# Altium PCB 2020年电赛校赛.PcbDoc (part 1 of 2)
Units mil, origin at the board's own origin, x right, y up, seen from the top; angles counter-clockwise.
Board outline 6325.03 x 2765.03 mil, 2 copper layers (Top Layer, Bottom Layer); 190 components, 62 nets, 601 pads, 1 vias.
Unrouted connection lines stored in the file: 82.
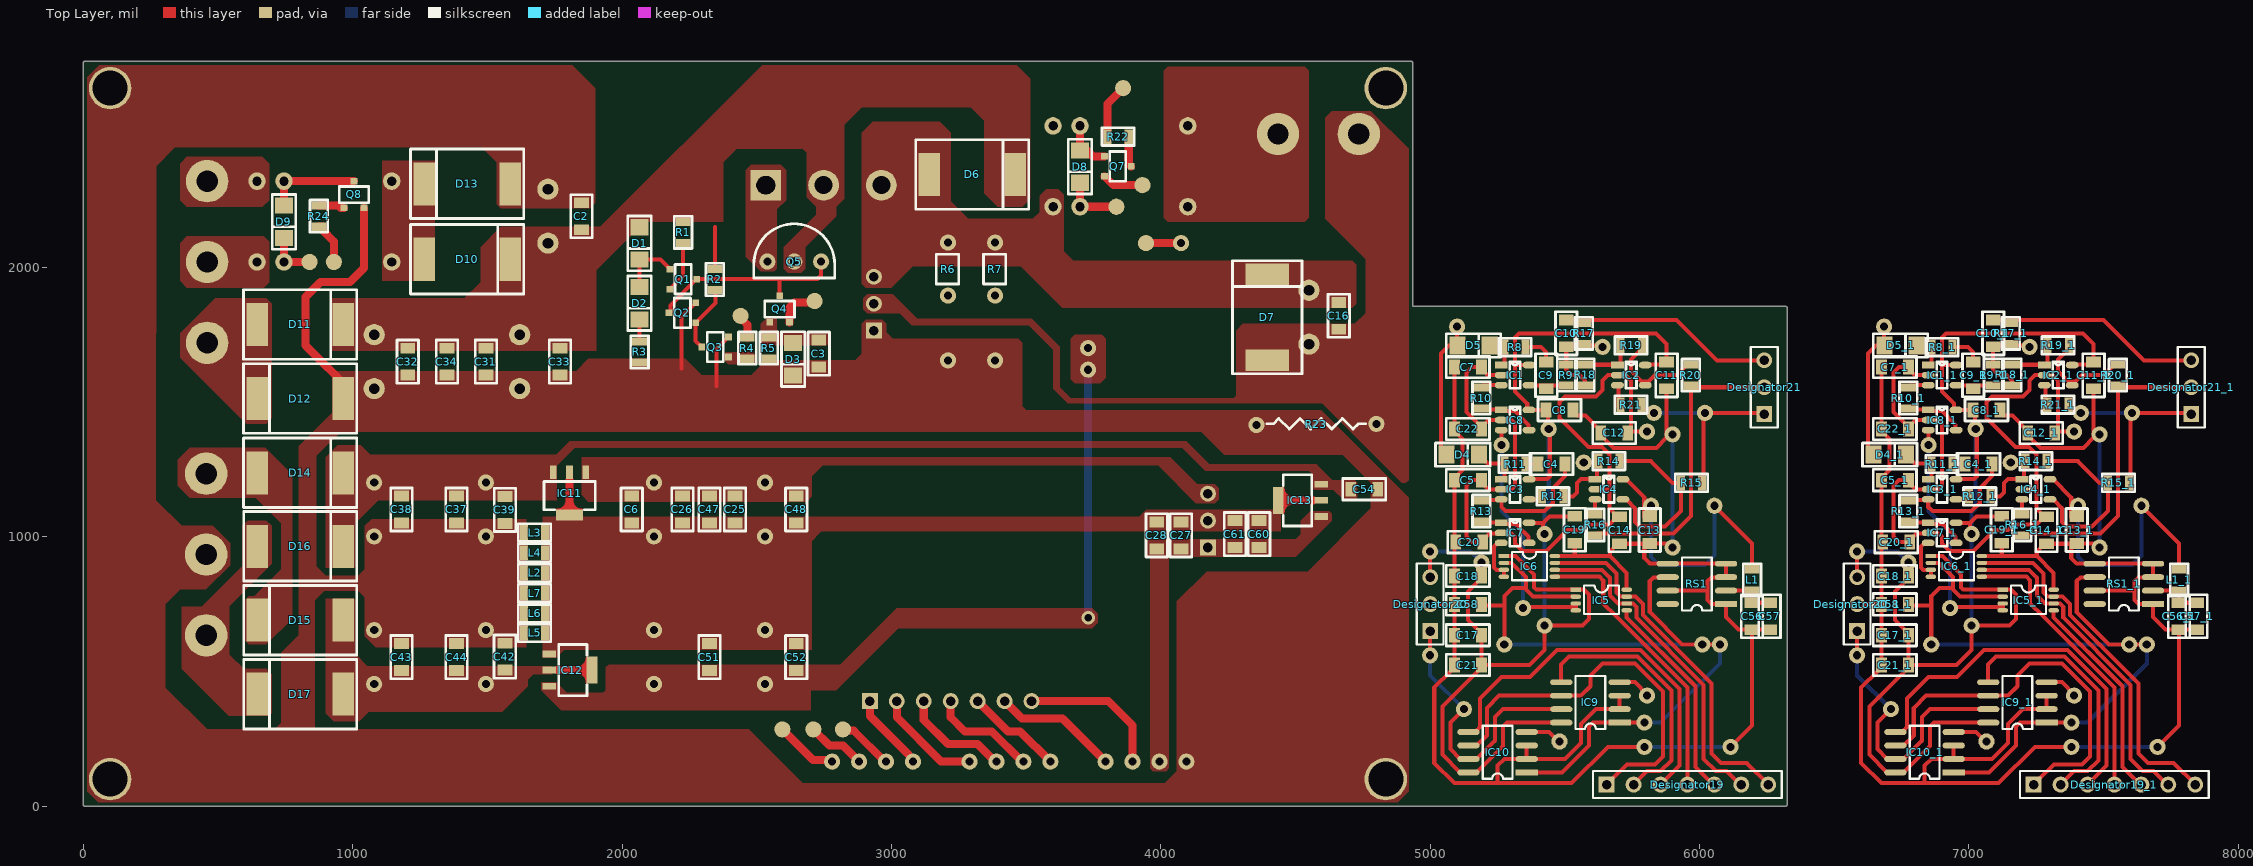
[diagram p0: Top Layer view]
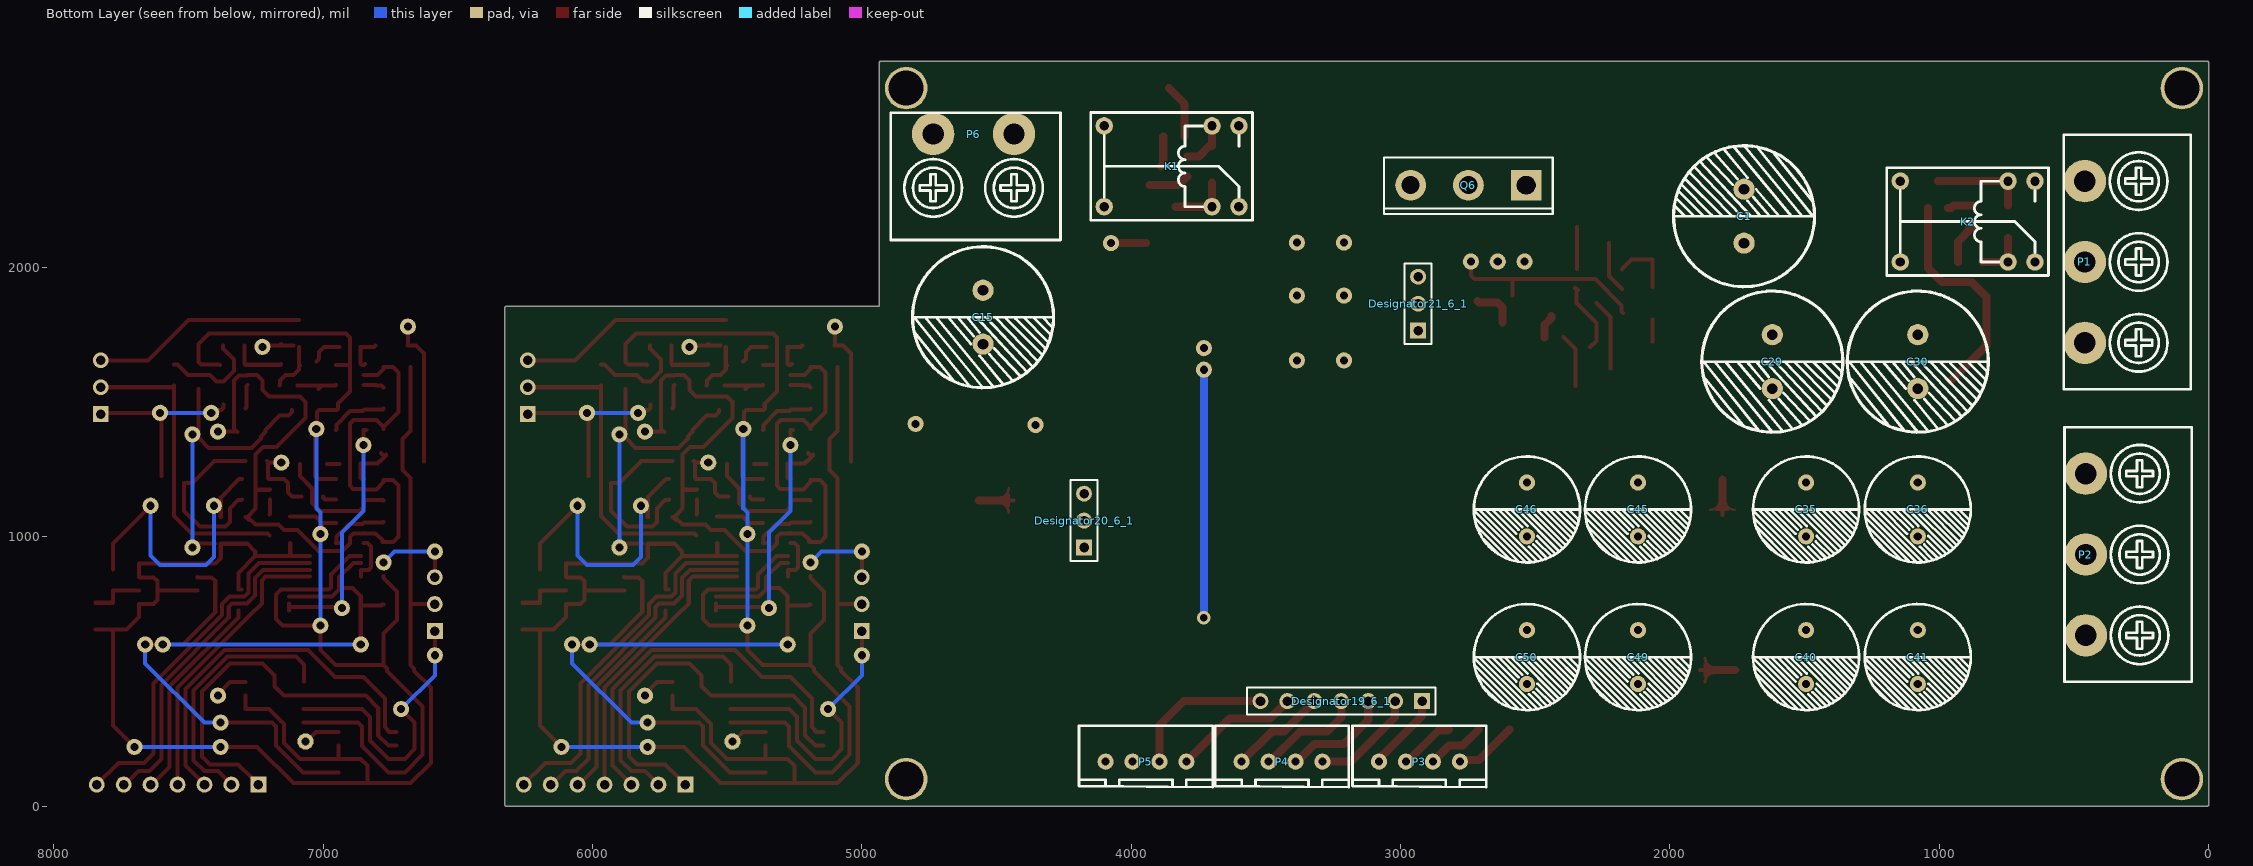
[diagram p1: Bottom Layer view, seen from below]

## Layer stack, top to bottom
Top Solder: solder mask 0.4, Solder Resist, Dk 3.5
Top Layer: signal copper 1.4
Dielectric 1: dielectric 12.6, FR-4, Dk 4.8
Bottom Layer: signal copper 1.4
Bottom Solder: solder mask 0.4, Solder Resist, Dk 3.5

## Board outline
5,-0.02 cw(c5,5) -0.01,5 -0.01,2760 cw(c5,2760) 5,2765.02 4930,2765.02 cw(c4930,2760) 4935.02,2760 4935.02,1855.01 6320,1855.01 cw(c6320,1850) 6325.02,1850 6325.02,5 cw(c6320,5) 6320,-0.02

## Design rules (kind name [scope] priority, off if disabled: settings)
Clearance [All] p1: gap=5 ignorepadtopadclearanceinfootprint=TRUE
ComponentClearance [All] p1: gap=5 collisioncheckmode=3 verticalgap=10 showdistances=FALSE
PolygonConnect [All] p1: connectstyle=Direct reliefconductorwidth=10 reliefentries=4 polygonreliefangle="90 Angle" airgapwidth=10
RoutingVias [All] p1: holewidth=28 width=50 viastyle="Through Hole" minholewidth=28 minwidth=50 maxholewidth=28 maxwidth=50
SolderMaskExpansion [All] p1: expansion=4 istentingtop=FALSE
Width [All] p1: maxlimit=100 minlimit=10 preferedwidth=30 minimp=50.000000 maximp=50.000000 favimp=50.000000
29 further rules are at their usual default settings.

## Classes and differential pairs
component class 2020年电赛校赛电源板: C29 C30 C31 C32 C33 C34 C35 C36 C37 C38 C39 C40 C41 C42 C43 C44 C45 C46 C47 C48 C49 C50 C51 C52 C54 C56 C57 C58 C60 C61 D9 D10 D11 D12 D13 D14 D15 D16 D17 IC11 IC12 IC13 K2 L1 L2 L3 L4 L5 L6 L7 P1 P2 P3 P4 P5 Q8 R24 RS1
component class 2020年电赛校赛测量、基准板: C17 C18 C19 C20 C21 C22 C25 C26 C27 C28 IC5 IC6 IC7 IC8 IC9 IC10
component class 2020年电赛校赛功率板: C1 C2 C3 C4 C5 C6 C7 C8 C9 C10 C11 C12 C13 C14 C15 C16 D1 D2 D3 D4 D5 D6 D7 D8 IC1 IC2 IC3 IC4 K1 P6 Q1 Q2 Q3 Q4 Q5 Q6 Q7 R1 R2 R3 R4 R5 R6 R7 R8 R9 R10 R11 R12 R13 R14 R15 R16 R17 R18 R19 R20 R21 R22 R23

## Components (designator, comment, footprint, x,y, rotation, side; value= is the part's Value field where it differs from the comment)
C1 "1000uF" CR132(Φ13.2,间距5.1) 1725,2190 r90 bottom value=50V
C2 "104" C0805 1849.4,2190 r180 top value=100V
C3 "222" C0805 2730,1680 r0 top value=35V
C4 "104" C0805 5450,1270 r270 top value=35V
C4_1 "104" C0805 7035,1270 r270 top value=35V (schematic designator C4)
C5 "104" C0805 5140,1210 r270 top value=35V
C5_1 "104" C0805 6725,1210 r270 top value=35V (schematic designator C5)
C6 "104" C0805 2035.9,1101.2 r0 top value=35V
C7 "104" C0805 5140,1630 r270 top value=35V
C7_1 "104" C0805 6725,1630 r270 top value=35V (schematic designator C7)
C8 "104" C0805 5480,1470 r90 top value=35V
C8_1 "104" C0805 7065,1470 r90 top value=35V (schematic designator C8)
C9 "472" C0805 5431.05,1599.1 r180 top value=35V
C9_1 "472" C0805 7016.05,1599.1 r180 top value=35V (schematic designator C9)
C10 "104" C0805 5505,1755 r0 top value=35V
C10_1 "104" C0805 7090,1755 r0 top value=35V (schematic designator C10)
C11 "104" C0805 5877.73,1598.98 r0 top value=35V
C11_1 "104" C0805 7462.73,1598.98 r0 top value=35V (schematic designator C11)
C12 "104" C0805 5683.14,1385.29 r270 top value=35V
C12_1 "104" C0805 7268.14,1385.29 r270 top value=35V (schematic designator C12)
C13 "104" C0805 5815,1025 r0 top value=35V
C13_1 "104" C0805 7400,1025 r0 top value=35V (schematic designator C13)
C14 "104" C0805 5703.01,1024.07 r0 top value=35V
C14_1 "104" C0805 7288.01,1024.07 r0 top value=35V (schematic designator C14)
C15 "1000uF" CR132(Φ13.2,间距5.1) 4550,1815 r270 bottom value=50V
C16 "104" C0805 4660.4,1820 r0 top value=100V
C17 "104" C0805 5140,634.13 r90 top value=35V
C17_1 "104" C0805 6725,634.13 r90 top value=35V (schematic designator C17)
C18 "104" C0805 5140,854.08 r90 top value=35V
C18_1 "104" C0805 6725,854.08 r90 top value=35V (schematic designator C18)
C19 "104" C0805 5536.61,1025.87 r0 top value=35V
C19_1 "104" C0805 7121.61,1025.87 r0 top value=35V (schematic designator C19)
C20 "104" C0805 5145,980 r270 top value=35V
C20_1 "104" C0805 6730,980 r270 top value=35V (schematic designator C20)
C21 "104" C0805 5140,523.43 r270 top value=35V
C21_1 "104" C0805 6725,523.43 r270 top value=35V (schematic designator C21)
C22 "104" C0805 5140,1400 r270 top value=35V
C22_1 "104" C0805 6725,1400 r270 top value=35V (schematic designator C22)
C25 "104" C0805 2419.71,1101.2 r0 top value=35V
C26 "104" C0805 2224.15,1101.2 r0 top value=35V
C27 "104" C0805 4075,1005 r0 top value=35V
C28 "104" C0805 3985,1005 r0 top value=35V
C29 "1000uF" CR132(Φ13.2,间距5.1) 1620,1650 r270 bottom value=50V
C30 "1000uF" CR132(Φ13.2,间距5.1) 1080,1650 r270 bottom value=50V
C31 "104" C0805 1494.63,1650 r0 top value=100V
C32 "104" C0805 1204.34,1650 r0 top value=100V
C33 "104" C0805 1769.31,1650 r0 top value=100V
C34 "104" C0805 1350,1650 r0 top value=100V
C35 "100uF" CR100(Φ10.0,间距4.9） 1494.63,1101.2 r270 bottom value=50V
C36 "100uF" CR100(Φ10.0,间距4.9） 1080,1101.2 r270 bottom value=50V
C37 "104" C0805 1385.64,1101.2 r0 top value=35V
C38 "104" C0805 1181.45,1101.2 r0 top value=35V
C39 "104" C0805 1565.05,1099.61 r0 top value=35V
C40 "100uF" CR100(Φ10.0,间距4.9） 1494.63,553.21 r270 bottom value=50V
C41 "100uF" CR100(Φ10.0,间距4.9） 1080,553.21 r270 bottom value=50V
C42 "104" C0805 1565,555 r0 top value=100V
C43 "104" C0805 1181.45,553.21 r0 top value=100V
C44 "104" C0805 1385.64,553.21 r0 top value=100V
C45 "100uF" CR100(Φ10.0,间距4.9） 2118.52,1101.2 r270 bottom value=50V
C46 "100uF" CR100(Φ10.0,间距4.9） 2530.85,1101.2 r270 bottom value=50V
C47 "104" C0805 2324.61,1101.2 r0 top value=100V
C48 "104" C0805 2646.85,1101.2 r0 top value=100V
C49 "100uF" CR100(Φ10.0,间距4.9） 2118.52,553.21 r270 bottom value=50V
C50 "100uF" CR100(Φ10.0,间距4.9） 2530.85,553.21 r270 bottom value=50V
C51 "104" C0805 2324.61,553.21 r0 top value=100V
C52 "104" C0805 2646.85,553.21 r0 top value=100V
C54 "104" C0805 4755,1176.21 r90 top value=35V
C56 "104" C0805 6195,705 r0 top value=35V
C56_1 "104" C0805 7780,705 r0 top value=35V (schematic designator C56)
C57 "104" C0805 6260,705 r0 top value=35V
C57_1 "104" C0805 7845,705 r0 top value=35V (schematic designator C57)
C58 "104" C0805 5140,748.98 r270 top value=35V
C58_1 "104" C0805 6725,748.98 r270 top value=35V (schematic designator C58)
C60 "104" C0805 4365,1010 r180 top value=35V
C61 "104" C0805 4275,1010 r180 top value=35V
D1 "1N4148" LL34 2065,2090 r270 top
D2 "1N4148" LL34 2065,1867.61 r270 top
D3 "1N4148" LL34 2635,1660 r270 top
D4 "1N4148" LL34 5120,1305 r0 top
D4_1 "1N4148" LL34 6705,1305 r0 top (schematic designator D4)
D5 "1N4148" LL34 5160,1710 r0 top
D5_1 "1N4148" LL34 6745,1710 r0 top (schematic designator D5)
D6 "SK1010" SMC(DO-214AB) 3300,2345 r270 top
D7 "SK1010" SMC(DO-214AB) 4395,1815 r0 top
D8 "1N4148" LL34 3700,2375 r270 top
D9 "1N4148" LL34 745,2170 r270 top
D10 "SK1010" SMC(DO-214AB) 1425,2030 r270 top
D11 "SK1010" SMC(DO-214AB) 805.02,1787.98 r270 top
D12 "SK1010" SMC(DO-214AB) 805,1512.9 r90 top
D13 "SK1010" SMC(DO-214AB) 1425,2310 r90 top
D14 "SK1010" SMC(DO-214AB) 805.02,1237.21 r270 top
D15 "SK1010" SMC(DO-214AB) 805.21,690.21 r90 top
D16 "SK1010" SMC(DO-214AB) 805.21,964.46 r270 top
D17 "SK1010" SMC(DO-214AB) 805.21,415.54 r90 top
Designator19 "Comment" HDR1X7 5655,80 r0 top
Designator19_1 "Comment" HDR1X7 7240,80 r0 top
Designator19_6_1 "Comment" HDR1X7 2920,390 r0 bottom
Designator20 "Comment" HDR1X3#1 5000,650 r90 top
Designator20_1 "Comment" HDR1X3#1 6585,650 r90 top
Designator20_6_1 "Comment" HDR1X3#1 4175,960 r90 bottom
Designator21 "Comment" HDR1X3#1 6240,1455 r90 top
Designator21_1 "Comment" HDR1X3#1 7825,1455 r90 top
Designator21_6_1 "Comment" HDR1X3#2 2935,1765 r90 bottom
IC1 "LTC2054HV" TSOT-32-5 5315,1600 r0 top
IC1_1 "LTC2054HV" TSOT-32-5 6900,1600 r0 top (schematic designator IC1)
IC2 "LTC2054HV" TSOT-32-5 5746.19,1600 r0 top
IC2_1 "LTC2054HV" TSOT-32-5 7331.19,1600 r0 top (schematic designator IC2)
IC3 "LTC2054HV" TSOT-32-5 5315,1176.2 r0 top
IC3_1 "LTC2054HV" TSOT-32-5 6900,1176.2 r0 top (schematic designator IC3)
IC4 "LTC2054HV" TSOT-32-5 5663.14,1176.21 r0 top
IC4_1 "LTC2054HV" TSOT-32-5 7248.14,1176.21 r0 top (schematic designator IC4)
IC5 "DAC8551" MSOP-8 5635,765 r0 top
IC5_1 "DAC8551" MSOP-8 7220,765 r0 top (schematic designator IC5)
IC6 "DAC8551" MSOP-8 5368.17,890 r0 top
IC6_1 "DAC8551" MSOP-8 6953.17,890 r0 top (schematic designator IC6)
IC7 "LTC2054HV" TSOT-32-5 5315,1014.43 r0 top
IC7_1 "LTC2054HV" TSOT-32-5 6900,1014.43 r0 top (schematic designator IC7)
IC8 "LTC2054HV" TSOT-32-5 5315,1433.31 r0 top
IC8_1 "LTC2054HV" TSOT-32-5 6900,1433.31 r0 top (schematic designator IC8)
IC9 "TM7711" SOP-8(体宽3.8mm) 5595,385 r180 top
IC9_1 "TM7711" SOP-8(体宽3.8mm) 7180,385 r180 top (schematic designator IC9)
IC10 "TM7711" SOP-8(体宽3.8mm) 5250,200 r180 top
IC10_1 "TM7711" SOP-8(体宽3.8mm) 6835,200 r180 top (schematic designator IC10)
IC11 "78L05" SOT-89#1 1805,1150 r180 top
IC12 "79L05" SOT-89#2 1820,505 r270 top
IC13 "78L05" SOT-89#1 4505,1135 r90 top
K1 "HRS1H-S-DC 6V" 继电器 3600,2225 r90 bottom
K2 "HRS1H-S-DC 6V" 继电器 645,2020 r90 bottom
L1 "100μH" R0805 6195,840 r180 top
L1_1 "100μH" R0805 7780,840 r180 top (schematic designator L1)
L2 "100μH" R0805 1675.1,865.58 r90 top
L3 "100μH" R0805 1675.1,1015.58 r90 top
L4 "100μH" R0805 1675.1,940.58 r90 top
L5 "100μH" R0805 1675.03,643.03 r90 top
L6 "100μH" R0805 1675.1,715.58 r90 top
L7 "100μH" R0805 1675.1,790.58 r90 top
P1 "主绕组 KF DG1000-3P" KF7.62-3P 460,2020 r90 bottom
P2 "辅助供电绕组 KF DG1000-3P" KF7.62-3P 456.46,934 r90 bottom
P3 "逻辑接口" XH2.54-4P 3080,165 r180 bottom
P4 "逻辑接口" XH2.54-4P 3590,165 r180 bottom
P5 "逻辑接口" XH2.54-4P 4095,165 r180 bottom
P6 "输出" KF7.62-2P 4735,2495 r180 bottom
Q1 "2N5401" SOT-23 2226.92,1956 r90 top
Q2 "2N5551" SOT-23 2224.15,1831.12 r270 top
Q3 "8050" SOT-23 2346.11,1704.16 r270 top
Q4 "2N5551" SOT-23 2585,1845 r180 top
Q5 "2SC2383" TO-92 2639.26,2021.51 r0 top
Q6 "TIP35" TO-247 2748.14,2305 r0 bottom
Q7 "8050" SOT-23 3840,2375 r90 top
Q8 "8050" SOT-23 1005,2270 r180 top
R1 "820" R0805 2226.92,2130 r180 top value=0805
R2 "10kΩ" R0805 2345,1955 r180 top value=0805
R3 "10kΩ" R0805 2065,1685.92 r180 top value=0805
R4 "1kΩ" R0805 2465,1700 r0 top value=0805
R5 "3kΩ" R0805 2545,1700 r180 top value=0805
R6 "1kΩ" RES-1W(立式) 3210,1895 r270 top value=1W
R7 "1kΩ" RES-1W(立式) 3385,1895 r270 top value=1W
R8 "10kΩ" R0805 5315,1704.19 r90 top value=0805
R8_1 "10kΩ" R0805 6900,1704.19 r90 top value=0805 (schematic designator R8)
R9 "10kΩ" R0805 5505,1600.33 r180 top value=0805
R9_1 "10kΩ" R0805 7090,1600.33 r180 top value=0805 (schematic designator R9)
R10 "10kΩ" R0805 5190,1515 r0 top value=0805
R10_1 "10kΩ" R0805 6775,1515 r0 top value=0805 (schematic designator R10)
R11 "10kΩ" R0805 5315,1270 r90 top value=0805
R11_1 "10kΩ" R0805 6900,1270 r90 top value=0805 (schematic designator R11)
R12 "10kΩ" R0805 5455,1150 r90 top value=0805
R12_1 "10kΩ" R0805 7040,1150 r90 top value=0805 (schematic designator R12)
R13 "10kΩ" R0805 5190,1094.93 r0 top value=0805
R13_1 "10kΩ" R0805 6775,1094.93 r0 top value=0805 (schematic designator R13)
R14 "18kΩ" R0805 5663.14,1280.58 r270 top value=0805
R14_1 "18kΩ" R0805 7248.14,1280.58 r270 top value=0805 (schematic designator R14)
R15 "2kΩ" R0805 5970,1200 r270 top value=0805
R15_1 "2kΩ" R0805 7555,1200 r270 top value=0805 (schematic designator R15)
R16 "2kΩ" R0805 5613.01,1044.07 r180 top value=0805
R16_1 "2kΩ" R0805 7198.01,1044.07 r180 top value=0805 (schematic designator R16)
R17 "180kΩ" R0805 5570,1755 r180 top value=0805
R17_1 "180kΩ" R0805 7155,1755 r180 top value=0805 (schematic designator R17)
R18 "20kΩ" R0805 5576.19,1600.64 r180 top value=0805
R18_1 "20kΩ" R0805 7161.19,1600.64 r180 top value=0805 (schematic designator R18)
R19 "2kΩ" R0805 5746.19,1710.48 r270 top value=0805
R19_1 "2kΩ" R0805 7331.19,1710.48 r270 top value=0805 (schematic designator R19)
R20 "18kΩ" R0805 5967.71,1600 r180 top value=0805
R20_1 "18kΩ" R0805 7552.71,1600 r180 top value=0805 (schematic designator R20)
R21 "2kΩ" R0805 5745,1490.22 r270 top value=0805
R21_1 "2kΩ" R0805 7330,1490.22 r270 top value=0805 (schematic designator R21)
R22 "1kΩ" R0805 3841.5,2485.07 r270 top value=0805
R23 "100mΩ" 100mΩ康铜 4799.88,1418.94 r180 top value=康铜
R24 "1kΩ" R0805 875,2190 r0 top value=0805
RS1 "ADR4533" SOP-8(体宽3.8mm) 5990,825 r180 top
RS1_1 "ADR4533" SOP-8(体宽3.8mm) 7575,825 r180 top (schematic designator RS1)

## Footprints (in the part's own frame and the unit in brackets; to place one, negate y for a bottom-side part, rotate by r counter-clockwise, add the part's x,y. Pads: shape width x height; smd on the part's side, far side on the other; paste and mask are expansions set on the pad)
100mΩ康铜 [mil]
  round 60 hole 30: 1(0,0) 2(444.88,3.94)
  silkscreen extent 39,-20 406,20
C0805 [mil]
  rect 55x40 smd: 1(0,-50) 2(0,50)
  silkscreen extent -40,-80 40,80, body extent -25,-43 25,43, height 50
CR100(Φ10.0,间距4.9） [mil]
  round 60 hole 30: 1(-100,0) 2(100,0)
  silkscreen extent -197,-197 197,197
CR132(Φ13.2,间距5.1) [mm]
  round 2 hole 1: 1(-2.54,0) 2(2.54,0)
  silkscreen extent -6.65,-6.65 6.65,6.65, body extent -6.77,-6.77 6.73,6.73, height 22.1
HDR1X3#1 [mm] "Connector; Header; 3 Position"
  rect 1.5x1.5 hole 0.9: 1(0,0)
  round 1.5 hole 0.9: 2(2.54,0) 3(5.08,0)
  silkscreen extent -1.27,-1.27 6.35,1.27
HDR1X3#2 [mm] "Connector; Header; 3 Position"
  round 1.5 hole 0.9: 2(2.54,0) 3(5.08,0)
  rect 1.5x1.5 hole 0.9: 3(0,0)
  silkscreen extent -1.27,-1.27 6.35,1.27
HDR1X7 [mm] "Connector; Header; 7 Position"
  rect 1.5x1.5 hole 0.9: 1(0,0)
  round 1.5 hole 0.9: 2(2.54,0) 3(5.08,0) 4(7.62,0) 5(10.16,0) 6(12.7,0) 7(15.24,0)
  silkscreen extent -1.27,-1.27 16.51,1.27
KF7.62-2P [mm] "接线器"
  round 4 hole 2: 1(0,0) 2(7.62,0)
  silkscreen extent -4,-10 12,2
KF7.62-3P [mm]
  round 4 hole 2: 1(-7.62,0) 2(0,0) 3(7.62,0)
  silkscreen extent -12,-10 12,2
LL34 [mil] "贴片二极管"
  rect 60x66 smd: 1(-59.06,0) 2(61.02,0)
  silkscreen extent -100,-43 102,43, body extent -69,-30 69,30, height 59
MSOP-8 [mm]
  rect 1x0.41 smd: 1(-2.4,0.975)
  oval 1x0.41 smd: 2(-2.4,0.325) 3(-2.4,-0.325) 4(-2.4,-0.975) 5(2.4,-0.975) 6(2.4,-0.325) 7(2.4,0.325) 8(2.4,0.975)
  silkscreen extent -1.64,-1.31 1.66,1.36, body extent -2.47,-1.55 2.47,1.55, height 1.1
R0805 [mil]
  rect 55x30 smd: 1(0,39.38) 2(0,-39.36)
  silkscreen extent -33,-60 33,60, body extent -25,-39 25,39, height 20
RES-1W(立式) [mil]
  round 60 hole 30: 1(0,0) 2(-196.85,0)
  silkscreen extent -154,-43 -43,39, body extent -213,-83 83,83, height 728
SMC(DO-214AB) [mil]
  rect 160x80 smd: 1(0,-160) 2(0,160)
  silkscreen extent -129,-210 129,210, body extent -124,-160 124,160, height 105
SOP-8(体宽3.8mm) [mm]
  rect 2.1x0.55 smd: 1(-2.75,1.905)
  oval 2.1x0.55 smd: 2(-2.75,0.635) 3(-2.75,-0.635) 4(-2.75,-1.905) 5(2.75,-1.905) 6(2.75,-0.635) 7(2.75,0.635) 8(2.75,1.905)
  silkscreen extent -1.4,-2.5 1.4,2.5, body extent -3.13,-2.53 3.13,2.53, height 1.76
SOT-23 [mil]
  rect 25x25 smd: 1(37,49) 2(0,-50) 3(-37,49)
  silkscreen extent -55,-30 55,30, body extent -59,-49 59,49, height 43
SOT-89#1 [mil]
  rect 25x50 smd: 1(-60,-90) 2(0,-90) 3(60,-90)
  rect 100x40 smd: 2(0.01,68.9)
  Top Layer region: -20,35 20,35 20,50 -20,50
  Top Layer region: -25,45 25,45 25,55 -25,55
  Top Layer region: -15,30 15,30 15,40 -15,40
  Top Layer region: -15,25 15,25 15,35 -15,35
  Top Layer lines w10: 10,15 cw(c45,15) 45,50 ccw(c45,15) 10,15 ; 10,15 10,-60 ; 10,15 10,-60 ; 10,-60 cw(c0,-60) 0,-70 ; 10,-60 cw(c0,-60) 0,-70 ; 0,68.89 ccw(c0,68.9) 0.01,68.9 ; 0,68.89 ccw(c0,68.9) 0.01,68.9 ; 0,-70 cw(c0,-60) -10,-60 ; 0,-70 cw(c0,-60) -10,-60 ; 0,-70 ccw(c0.01,-69.99) 0,-70 ; 0,-70 ccw(c0.01,-69.99) 0,-70 ; 0,-70 ccw(c0.01,-69.99) 0,-70 ; 0,-70 ccw(c0.01,-69.99) 0.01,-70 ; 0,-70 ccw(c0.01,-69.99) 0.01,-70 ; 0,-70 ccw(c0.01,-69.99) 0,-70 ; -10,15 ccw(c-45,15) -45,50 cw(c-45,15) -10,15 ; -10,15 -10,-5 ; -10,15 -10,-5 ; -10,-5 -10,-60 ; -10,-5 -10,-60
  Top Layer lines w15: 0,68.89 0,68.89 ; 0,68.89 0,68.89 ; 0,68.89 0,5 ; 0,68.89 0,68.89 ; 0,68.89 0,68.89 ; 0,68.89 0,5 ; 0,68.89 0,68.89 ; 0,68.89 0,68.89 ; 0,68.89 0,68.89 ; 0,68.89 0,68.89 ; 0,68.89 0,68.89 ; 0,68.89 0,68.89 ; 0,68.89 0,68.89 ; 0,68.89 0,68.89 ; 0,68.89 0,68.89 ; 0,68.89 0,68.89 ; 0,68.89 0,68.89 ; 0,68.89 0,68.89 ; 0,68.89 0,68.89 ; 0,68.89 0,68.89 ; 0,68.89 0,68.89 ; 0,68.89 0,68.89 ; 0,68.89 0,68.89 ; 0,68.89 0,68.89 ; 0,5 0,-70 ; 0,5 0,-70 ; 0,-70 0,-70 ; 0,-70 0,-70 ; 0,-70 0,-70 ; 0,-70 0,-70 ; 0,-70 0,-70 ; 0,-70 0,-70 ; 0,-70 0,-70 ; 0,-70 0,-70 ; 0,-70 0,-70 ; 0,-70 0,-70 ; 0,-70 0,-70 ; 0,-70 0,-70 ; 0,-70 0,-70 ; 0,-70 0,-70 ; 0,-70 0,-70 ; 0,-70 0,-70 ; 0,-70 0,-70 ; 0,-70 0,-70 ; 0,-70 0,-70 ; 0,-70 0,-70 ; 0,-70 0,-70 ; 0,-70 0,-70
  silkscreen extent -95,-55 95,50, body extent -89,-89 89,69, height 61
SOT-89#2 [mil]
  rect 25x50 smd: 1(-60,-90) 2(0,-90) 3(60,-90)
  rect 100x40 smd: 2(0.01,68.9)
  Top Layer region: -20,35 20,35 20,50 -20,50
  Top Layer region: -25,45 25,45 25,55 -25,55
  Top Layer region: -15,30 15,30 15,40 -15,40
  Top Layer region: -15,25 15,25 15,35 -15,35
  Top Layer lines w10: 0,-70 ccw(c0,-60) 10,-60 ; 0,-70 cw(c0,-60) -10,-60 ; 0,-70 ccw(c0.01,-69.99) 0.01,-70 ; 0,-70 ccw(c0,-60) 10,-60 ; 0,-70 ccw(c0.01,-69.99) 0,-70 ; 0,-70 ccw(c0.01,-69.99) 0.01,-70 ; 0,-70 ccw(c0.01,-69.99) 0,-70 ; 0,-70 cw(c0,-60) -10,-60 ; 10,-60 10,15 ; 10,-60 10,15 ; -10,-60 -10,15 ; -10,-60 -10,15 ; 10,15 cw(c45,15) 26.97,45 cw(c45,15) 45,50 ccw(c45,15) 10,15 ; -10,15 ccw(c-45,15) -13.38,30 ; -10,15 ccw(c-45,15) -13.38,30 ; -13.38,30 ccw(c-45,15) -45,50 cw(c-45,15) -13.38,30 ; 0,68.89 ccw(c0,68.9) 0.01,68.9 ; 0,68.89 ccw(c0,68.9) 0.01,68.9
  Top Layer lines w15: 0,-70 0,5 ; 0,-70 0,-70 ; 0,-70 0,5 ; 0,-70 0,-70 ; 0,-70 0,-70 ; 0,5 0,30 ; 0,5 0,30 ; 0,30 0,53 ; 0,30 0,53 ; 0,53 0,68.89 ; 0,53 0,68.89 ; 0,68.89 0,68.89 ; 0,68.89 0,68.89 ; 0,68.89 0,68.89
  silkscreen extent -95,-55 95,50, body extent -89,-89 89,69, height 61
TO-92 [mil]
  round 60 hole 30: 1(-100,0) 2(0,0) 3(100,0)
  silkscreen extent -150,-61 150,140, body extent -109,-61 109,100, height 405
TO-247 [mm]
  rect 2.9x2.9 hole 1.7 slot 1.785 at 0 deg copper offset 0.001,0: 1(-5.45,0)
  round 2.9 hole 1.7: 2(-0.001,0) 3(5.45,0)
  silkscreen extent -7.95,-2.6 7.95,2.7, body extent -7.9,-2.26 7.9,3.05, height 25.24
TSOT-32-5 [mm]
  rect 1.22x0.62 smd: 1(-1.3,0.95)
  oval 1.22x0.62 smd: 2(-1.3,0) 3(-1.3,-0.95) 4(1.32,-0.95) 5(1.32,0.95)
  silkscreen extent -0.5,-1.25 0.5,1.25, body extent -1.4,-1.45 1.4,1.45, height 0.85
XH2.54-4P [mil] "连接器"
  round 60 hole 30: 1(0,0) 2(100,0) 3(200,0) 4(300,0)
  silkscreen extent -98,-94 398,134, body extent -96,-94 396,134, height 276
继电器 [mil]
  round 65 hole 35: 1(0,0) 2(0,100) 3(0,500) 4(300,500) 5(300,100) 6(300,0)
  silkscreen extent -50,-50 350,550

## Part data
C1 C15 C29 C30: library part 100uF, "有极性电容"
C2 C4 C4_1 C5 C5_1 C6 C7 C7_1 C8 C8_1 C10 C10_1 C11 C11_1 C12 C12_1 C13 C13_1 C14 C14_1 C16 C17 C17_1 C18 C18_1 C19 C19_1 C20 C20_1 C21 C21_1 C22 C22_1 C25 C26 C27 C28 C31 C32 C33 C34 C37 C38 C39 C42 C43 C44 C47 C48 C51 C52 C54 C56 C56_1 C57 C57_1 C58 C58_1 C60 C61: "无极性电容"
C3 C9 C9_1: library part 104, "无极性电容"
C35 C36 C40 C41 C45 C46 C49 C50: "有极性电容"
D1 D2 D3 D4 D4_1 D5 D5_1 D6 D7 D8 D9 D10 D11 D12 D13 D14 D15 D16 D17: library part Diode, "二极管"
IC1 IC1_1 IC2 IC2_1 IC3 IC3_1 IC4 IC4_1 IC7 IC7_1 IC8 IC8_1: library part OPA350UA, "运放"
IC11 IC13: library part AMS1117-3.3, "LDO"
IC12: library part 790?, "LDO"
K1 K2: "继电器"
L1 L1_1 L2 L3 L4 L5 L6 L7: library part 470mH, "电感"
P1 P2: library part "Header 3", "Header, 3-Pin", LatestRevisionDate=17-Jul-2002, LatestRevisionNote="Re-released for DXP Platform.", Publisher="Altium Limited"
P3 P4 P5: library part "Header 4", "Header, 4-Pin", LatestRevisionDate=17-Jul-2002, LatestRevisionNote="Re-released for DXP Platform.", Publisher="Altium Limited"
P6: library part "Header 2", "Header, 2-Pin", LatestRevisionDate=17-Jul-2002, LatestRevisionNote="Re-released for DXP Platform.", Publisher="Altium Limited"
Q1: library part PNP
Q2: library part NPN!
Q3: library part NPN!, "三极管"
Q4 Q5 Q6 Q7 Q8: library part NPN, "三极管"
R1 R4 R5 R6 R7 R14 R14_1 R15 R15_1 R16 R16_1 R17 R17_1 R18 R18_1 R19 R19_1 R20 R20_1 R21 R21_1 R22 R23 R24: library part 10kΩ, "贴片/直插电阻"
R2 R3 R8 R8_1 R9 R9_1 R10 R10_1 R11 R11_1 R12 R12_1 R13 R13_1: "贴片/直插电阻"
RS1 RS1_1: "高精度基准源"

## Free pads (board coordinates)
  round 60 hole 30: 70(5440,1400) 70(7025,1400) 72(5900,1380) 72(7485,1380) 73(5640,1705) 73(7225,1705) 74(5570,1275) 74(7155,1275) 76(5345,735) 76(6930,735) 78(5265,1340) 78(6850,1340) 79(6020,1460) 79(7605,1460) 80(5830,1460) 80(7415,1460) 81(3730,1700) 81(5805,1390) 81(7390,1390) 83(5425,1010) 83(7010,1010) 86(6010,600) 86(7595,600) 87(5275,600) 87(6860,600) 88(5425,670) 88(7010,670) 89(5900,960) 89(7485,960) 90(5820,1115) 90(7405,1115) 91(6055,1115) 91(7640,1115) 92(5190,905) 92(6775,905) 93(5805,410) 93(7390,410) 94(5480,240) 94(7065,240) 95(6075,600) 95(7660,600) 96(5795,310) 96(7380,310) 97(5795,220) 97(7380,220) 98(6115,220) 98(7700,220) 99(5125,360) 99(6710,360) 100(5000,560) 100(6585,560) 101(5000,945) 101(6585,945) 102(4075,2090) 102(5100,1780) 102(6685,1780) 103(3730,1620) 116(3210,1655) 117(3385,1655)
  round 60 smd: 104(2595,285) 105(2710,285) 106(2820,285) 107(840,2020) 108(3835,2225) 109(930,2020) 111(3860,2665) 112(2440,1820) 113(2715,1875) 114(3945,2090) 115(3931.88,2305)
  round 157.48 hole 129.92: 110(100,100) 110(100,2665) 110(4835,100) 110(4835,2665)

## Via types
v1: diameter 50, hole 28, Top Layer to Bottom Layer, 1 vias

## Nets (pads, with @x,y where several pads share a name; then routed paths per layer and width w, separated by ;. In a path a pad name is that pad's centre, name@x,y a point inside that pad or via, vN(x,y) a via of type N, cw(c..) or ccw(c..) an arc to the next point about the centre after c; other vN are vias at no path point)
+3.3V: 
+3.3V(A): C58.2 IC5.2 IC6.2 IC9.1 IC10.1 pad.86@6010,600 pad.87@5275,600 pad.95@6075,600 pad.96@5795,310 RS1.6 | length 2934.3
  Top Layer w15: C58.2@5190,748.98 5196.02,748.98 5200,745 5275,745 ; IC6.2@5273.69,902.8 5302.23,902.77 5355,850 5355,805 ; pad.87@5275,600 5275,745 ; IC10.1@5358.27,125 5490,125 5590,225 5590,295 5605,310 IC9.1@5703.27,310 pad.96@5795,310 ; IC5.2@5540.51,777.8 5382.2,777.8 5355,805 ; RS1.6@5881.73,850 5880.46,848.73 5828.73,848.73 5815,835 5815,720 5935,600 pad.86@6010,600 pad.95@6075,600 ; 5275,745 5275,780 5305,810 5350,810 5355,805
  Bottom Layer w15: pad.87@5275,600 pad.86@6010,600 ; pad.96@5795,310 5855,310 6075,530 pad.95@6075,600
+5: D9.2 K2.2 pad.107 | length 184
  Top Layer w30: D9.2@745,2108.98 K2.2@745,2020 pad.107@840,2020
+5V: C27.1 C28.1 C60.2 C61.2 D8.2 Designator20.1 Designator20_6_1.1 IC9.7 IC10.7 IC13.1 K1.2 P5.2 pad.99@5125,360 pad.100@5000,560 pad.108 | length 1289.7
  Top Layer w15: pad.100@5000,560 Designator20.1@5000,650 ; pad.99@5125,360 5075,310 5075,211.22 5111.22,175 IC10.7@5141.73,175 5172.24,175 5240,242.76 5240,330 5270,360 IC9.7@5486.73,360
  Top Layer w30: D8.2@3700,2313.98 K1.2@3700,2225 pad.108@3835,2225
  Bottom Layer w15: pad.100@5000,560 5000,485 pad.99@5125,360
+5V(A): C6.2 C8.2 C11.2 C13.2 C17.1 C18.1 C19.2 C21.2 C25.2 C26.2 C45.1 C46.1 C47.2 C48.2 Designator20.3 Designator20_6_1.3 IC1.5 IC2.5 IC3.5 IC4.5 IC5.1 IC6.1 IC7.5 IC8.5 IC9.8 IC10.8 IC11.1 L1.2 pad.70@5440,1400 pad.83@5425,1010 pad.88@5425,670 pad.90@5820,1115 pad.91@6055,1115 pad.92@5190,905 pad.101@5000,945 | length 6213.8
  Top Layer w15: Designator20.3@5000,850 pad.101@5000,945 ; C18.1@5190,854.08 5190,846.58 5140,796.58 5140,691.63 5190,641.63 C17.1@5190,634.13 C21.2@5190,523.43 ; IC6.1@5273.69,928.39 5316.63,928.37 5385,860 5385,812.17 5393.79,803.39 IC5.1@5540.51,803.39 ; IC7.5@5366.97,1051.83 5419.02,1051.83 ; IC3.5@5366.97,1213.61 5433.61,1213.61 5443.79,1223.79 5443.79,1396.21 5436.97,1403.03 5436.97,1463.03 C8.2@5430,1470 ; IC1.5@5366.97,1637.4 5317.6,1637.4 5315,1640 ; C8.2@5424.29,1470.71 5364.53,1470.71 5360.18,1475.06 5360.18,1494.82 5315,1540 5315,1640 ; pad.83@5425,1010 5419.02,1015.98 5419.02,1051.83 ; IC9.8@5486.73,310 5285,310 5270,295 5270,222.76 5172.24,125 IC10.8@5141.73,125 5111.22,125 5045,191.22 5045,370 5177.5,502.5 5177.5,510.93 C21.2@5190,523.43 ; C19.2@5536.61,1075.87 5443.06,1075.87 5419.02,1051.83 ; IC5.1@5540.51,803.39 5571.63,803.37 5590,785 5590,695 5565,670 pad.88@5425,670 5425,580 5368.43,523.43 C21.2@5190,523.43 ; IC4.5@5715.11,1213.61 5726.92,1213.61 5794.62,1145.9 C13.2@5794.62,1073.96 ; IC2.5@5798.16,1637.4 5799.96,1639.2 5867.96,1639.2 5877.88,1649.12 5877.88,1715.75 5838.63,1755 5330,1755 5315,1740 5315,1640 ; pad.91@6055,1115 6195,975 L1.2@6195,879.36
  Bottom Layer w15: pad.101@5000,945 5150,945 pad.92@5190,905 ; pad.88@5425,670 pad.83@5425,1010 5425,1090 5440,1105 pad.70@5440,1400 ; pad.90@5820,1115 5820,925 5850,895 6020,895 6055,930 pad.91@6055,1115
+15V: C35.1 C36.1 C37.2 C38.2 C39.2 C54.2 D14.2 D16.2 IC11.3 IC13.3
-5V(A): C5.2 C7.2 C12.2 C14.2 C20.2 C22.2 C49.2 C50.2 C51.1 C52.1 IC1.2 IC2.2 IC3.2 IC4.2 IC7.2 IC8.2 IC12.3 pad.81@3730,1700 pad.81@5805,1390 pad.103 | length 3986.1
  Top Layer w15: C22.2@5190,1400 C22.2@5190,1407.5 ; IC1.2@5263.82,1600 5212.5,1600 5190,1622.5 C7.2@5190,1630 5155,1630 5135,1610 5135,1462.5 C22.2@5190,1407.5 ; IC4.2@5611.96,1176.21 5613.76,1174.4 5664.41,1174.4 5665,1175 ; C14.2@5690.51,1061.57 C14.2@5703.01,1074.07 C14.2@5695.51,1074.07 ; C12.2@5733.14,1388.17 5745,1400.03 5745,1580.4 5727.2,1598.2 5696.81,1598.2 IC2.2@5695.01,1600 5660,1600 5640,1580 5640,1545 5615,1520 5500,1520 5480,1500 5480,1440 5587.06,1332.94 5637.06,1332.94 5665,1305 5665,1175 ; C12.2@5737.85,1390 pad.81@5805,1390 ; C22.2@5190,1407.5 5215.81,1433.31 IC8.2@5263.82,1433.31 5301.69,1433.31 5309.99,1425.01 5315,1420 5315,1190 5303.01,1178.01 5265.62,1178.01 IC3.2@5263.82,1176.2 5216.3,1176.2 5190,1202.5 C5.2@5190,1210 5155,1210 5135,1190 5135,1000 5150.01,984.99 5155,980 C20.2@5195,980 5195,987.5 5220.13,1012.63 5262.02,1012.63 IC7.2@5263.82,1014.43 5265.62,1012.63 5302.37,1012.63 5315,1000 5315,974.28 5341.96,947.32 5432.32,947.32 5510,1025 5560,1025 5580,1045 5666.44,1045 C14.2@5695.51,1074.07 ; 5665,1175 5665,1104.58 C14.2@5695.51,1074.07
  Bottom Layer w30: v1(3730,700) pad.103@3730,1620
-15V: C40.2 C41.2 C42.1 C43.1 C44.1 D15.1 D17.1 IC12.2
AIN: IC4.1 IC10.4 pad.74@5570,1275 pad.94@5480,240 R12.2 R14.2 | length 431.7
  Top Layer w15: IC10.4@5358.27,275 5440.75,275 5475.75,240 pad.94@5480,240 ; R12.2@5494.36,1150 5530,1150 5545,1165 5545,1200 5560,1215 5610.56,1215 IC4.1@5611.96,1213.61 5615.3,1213.61 5620,1218.31 5620,1276.8 R14.2@5623.77,1280.58 5618.2,1275 pad.74@5570,1275
AISCK: Designator19.3 Designator19_6_1.5 IC10.5 P4.1 | length 1781.6
  Top Layer w15: IC10.5@5141.73,275 5170.44,275 5173.52,278.07 5173.52,281.59 5185,293.07 5185,400 5265,480 5370,480 5470,580 5780,580 5925,435 5925,150 Designator19.3@5855,80
  Top Layer w30: Designator19_6_1.5@3320,390 3432.41,277.59 3477.41,277.59 P4.1@3590,165
AMISO: Designator19.1 Designator19_6_1.7 IC9.6 IC10.6 P5.3 | length 2017.2
  Top Layer w15: IC10.6@5141.73,225 5172.24,225 5210,262.76 5210,365 5255,410 IC9.6@5486.73,410 5560,410 5595,445 5595,485 5640,530 5760,530 5865,425 5865,185 5835,155 5730,155 5677.03,102.03 Designator19.1@5655,80
  Top Layer w30: Designator19_6_1.7@3520,390 3805,390 3895,300 P5.3@3895,165
AVSCK: Designator19.2 Designator19_6_1.6 IC9.5 P5.4 | length 1445
  Top Layer w15: IC9.5@5485,462.6 5485,525 5515,555 5770,555 5895,430 5895,170 5855,130 5805,130 Designator19.2@5755,80
  Top Layer w30: Designator19_6_1.6@3420,385 3425,385 3485,325 3635,325 P5.4@3795,165
  Top Layer w40: Designator19_6_1.6@3420,385 Designator19_6_1.6@3420,390
DAC1: IC6.3 IC6.4 IC7.3 | length 176.9
  Top Layer w15: IC7.3@5263.82,977.03 5249.99,977.03 5236.5,963.54 5236.5,886.01 5245.29,877.23 IC6.3@5273.69,877.2 ; IC6.4@5273.69,851.61 IC6.3@5273.69,877.2
DAC2: IC5.3 IC5.4 IC8.3 pad.76@5345,735 pad.78@5265,1340 | length 926.7
  Top Layer w15: IC8.3@5254.55,1395.91 IC8.3@5263.82,1395.91 5264.41,1395.32 5264.41,1340.59 pad.78@5265,1340 ; pad.76@5345,735 5349.41,739.41 5540.51,739.41 ; IC5.4@5540.51,726.61 5540.51,739.41 ; IC5.3@5540.51,752.2 5540.51,739.41
  Bottom Layer w15: pad.78@5265,1340 5265,1095 5345,1015 pad.76@5345,735
"DAC A": IC7.1 IC7.4 R13.2 | length 231.1
  Top Layer w15: R13.2@5190,1055.57 5191.87,1053.7 5261.95,1053.7 IC7.1@5263.82,1051.83 5268.52,1047.13 5317.85,1047.13 5342.85,1022.13 5349.99,1015.01 5365,1000 5365,979 IC7.4@5366.97,977.03 IC7.4@5357.7,977.03
"DAC V": IC8.1 IC8.4 R10.2 | length 220
  Top Layer w15: R10.2@5190,1475.64 5192.47,1473.17 5261.36,1473.17 IC8.1@5263.82,1470.71 5268.52,1466.01 5313.99,1466.01 5365,1415 5365,1397.87 IC8.4@5366.97,1395.91
DACS: Designator19.4 Designator19_6_1.4 IC6.5 P4.2 | length 1470.8
  Top Layer w15: IC6.5@5462.66,851.61 5628.03,851.61 5642.3,837.34 5642.3,752.7 5690,705 5955,440 Designator19.4@5955,80
  Top Layer w30: Designator19_6_1.4@3220,390 3220,330 3272.41,277.59 3372.41,277.59 3485,165 P4.2@3490,165
DMISO: Designator19.7 Designator19_6_1.1 IC5.7 IC6.7 P3.1 | length 1641.3
  Top Layer w15: IC6.7@5462.66,902.8 5652.2,902.8 5692.3,862.7 5692.3,792.79 5707.28,777.82 IC5.7@5729.49,777.8 IC5.7@5729.49,777.8 5762.58,777.77 5790,750.36 5790,710 6045,455 6045,195 6080,160 6175,160 Designator19.7@6255,80
  Top Layer w30: Designator19_6_1.1@2920,390 2920,335 3065,190 3065,188.12 3080,173.12 P3.1@3080,165
DSCK: Designator19.6 Designator19_6_1.2 IC5.6 IC6.6 P4.4 | length 1643.6
  Top Layer w15: IC6.6@5462.66,877.2 5637.8,877.2 5667.3,847.7 5667.3,782.44 5697.52,752.23 IC5.6@5729.49,752.2 ; IC5.6@5729.49,752.2 5729.71,751.99 5753.01,751.99 5765,740 5765,700 6015,450 6015,175 6060,130 6100,130 6150,80 Designator19.6@6155,80
  Top Layer w30: Designator19_6_1.2@3020,390 3020,330 3184.47,165.53 3289.47,165.53 P4.4@3290,165
DVCS: Designator19.5 Designator19_6_1.3 IC5.5 P4.3 | length 1188.6
  Top Layer w15: IC5.5@5729.49,726.61 5729.49,700.51 5985,445 5985,145 6050,80 Designator19.5@6055,80
  Top Layer w30: Designator19_6_1.3@3120,390 3120,320 3210,230 3320,230 3385,165 P4.3@3390,165